# Altium PCB LTM8051.PcbDoc
Units mm, origin at the board's own origin, x right, y up, seen from the top; angles counter-clockwise.
Board outline 50 x 50 mm, 2 copper layers (L1, L6), stack 0.142 mm thick; 19 components, 8 nets, 121 pads, 59 vias.
Unrouted connection lines stored in the file: 98.
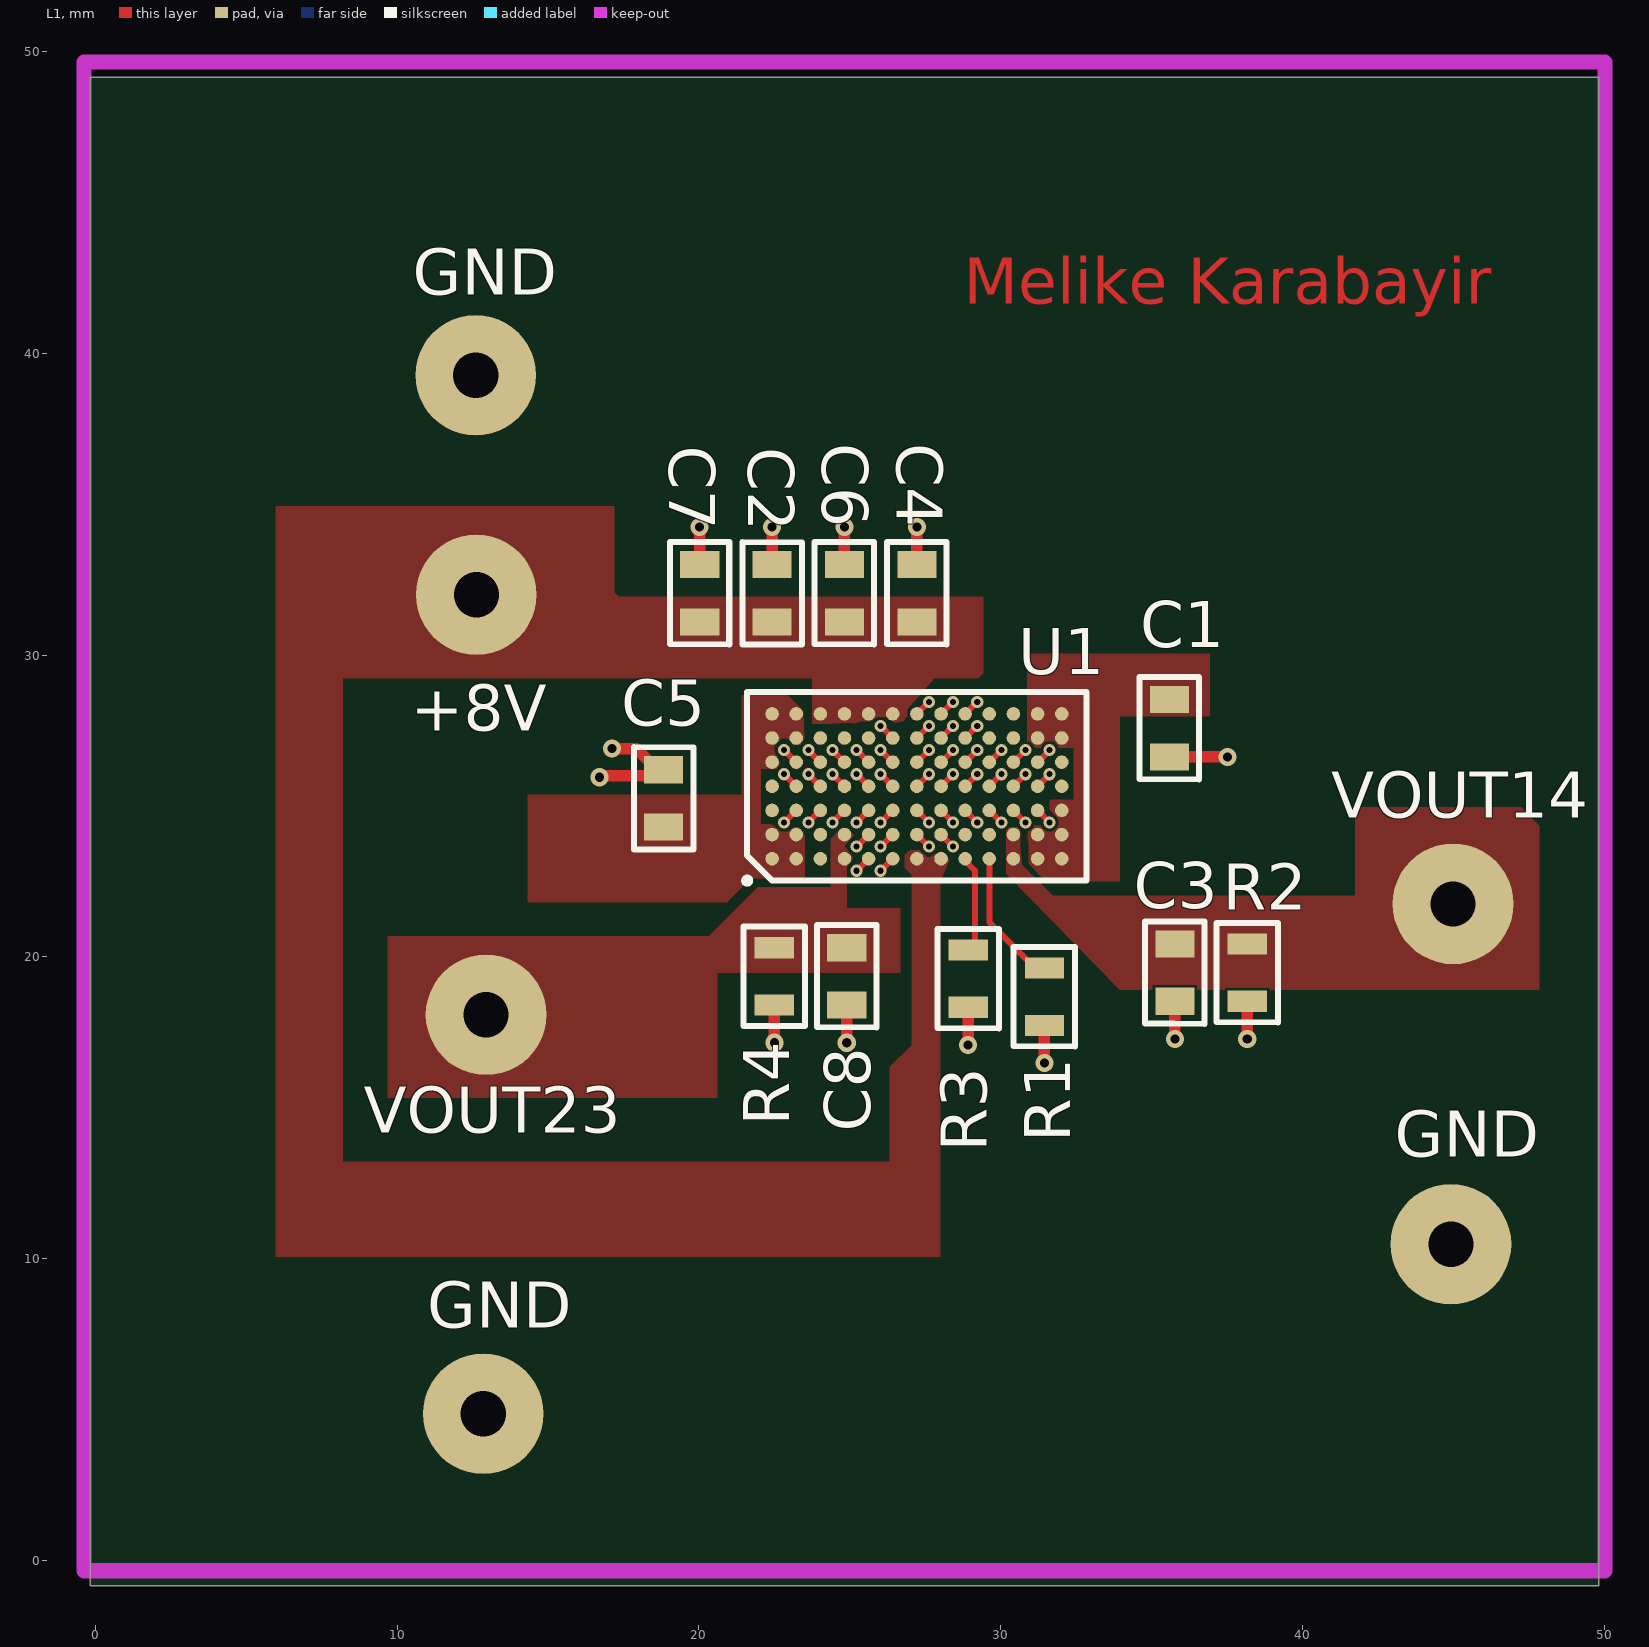
[diagram p0: L1 view]
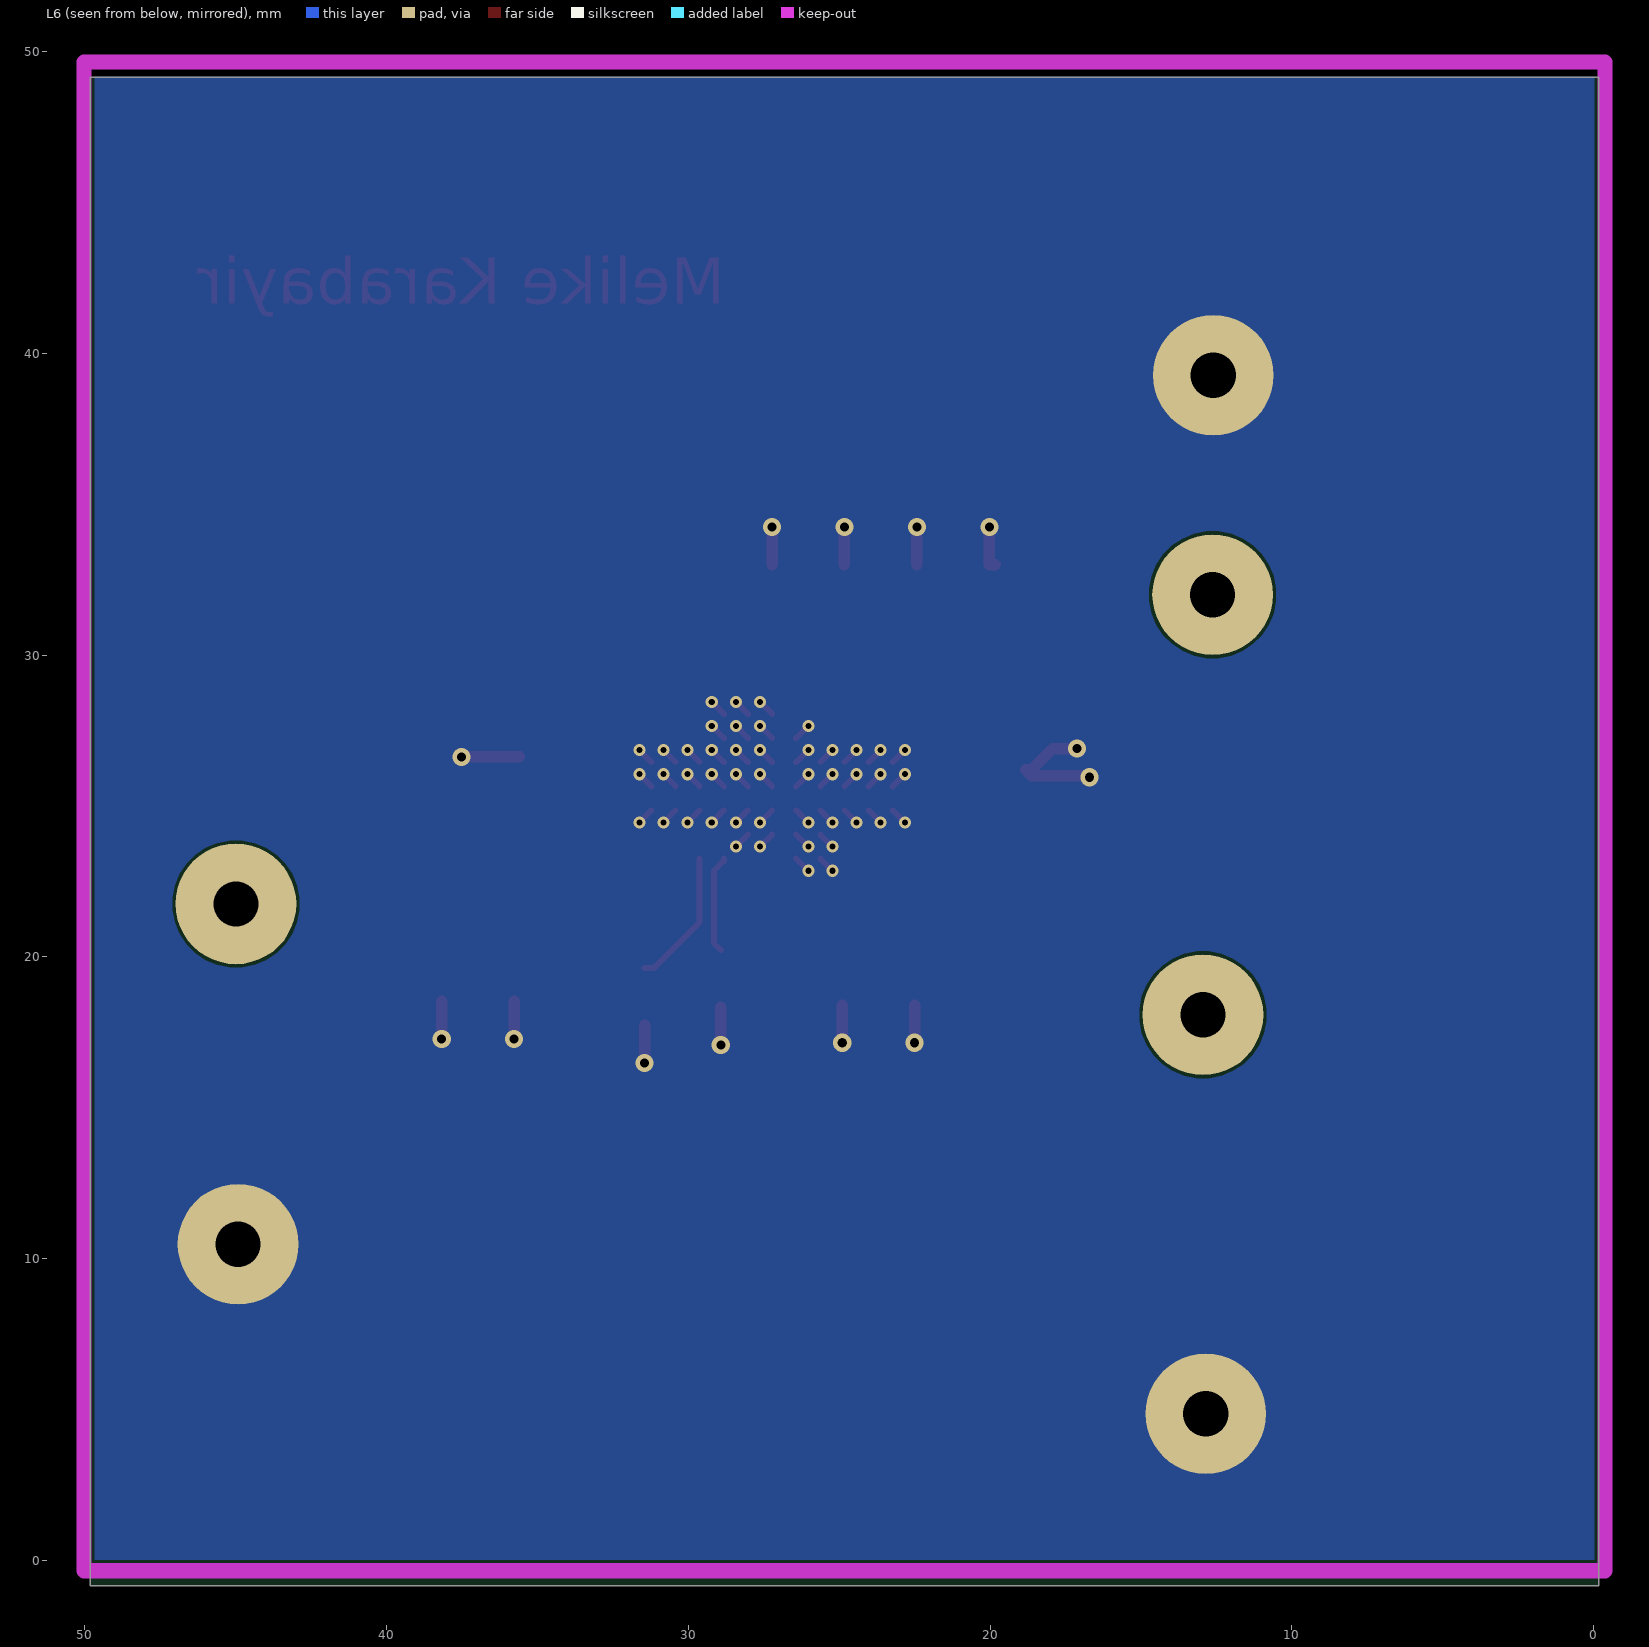
[diagram p1: L6 view, seen from below]

## Layer stack, top to bottom
Top Solder: solder mask 0.0102, Solder Resist, Dk 3.5
L1: signal copper 0.0356
Dielectric 2: prepreg 0.0711, PP-006, Dk 4.1
L6: signal copper 0.0356
Bottom Solder: solder mask 0.0102, Solder Resist, Dk 3.5

## Board outline
-0.175,-0.85 49.825,-0.85 49.825,49.15 -0.175,49.15

## Design rules (kind name [scope] priority, off if disabled: settings)
Clearance [All] p1: gap=0.1 ignorepadtopadclearanceinfootprint=FALSE
ComponentClearance [All] p1: gap=0.099 collisioncheckmode=3 verticalgap=0.099 showdistances=FALSE
MinimumSolderMaskSliver [All] p1: minsoldermaskwidth=0.1
NetAntennae [All] p1: netantennaetolerance=3
PlaneConnect [All] p1: planeconnectstyle=Relief reliefexpansion=0.508 reliefentries=4 reliefconductorwidth=0.254 reliefairgap=0.1
PolygonConnect [All] p1: connectstyle=Direct reliefconductorwidth=0.254 reliefentries=4 polygonreliefangle="90 Angle" airgapwidth=0.254
RoutingVias [All] p1: holewidth=0.3 width=0.6 viastyle="Through Hole" minholewidth=0.3 minwidth=0.6 maxholewidth=0.3 maxwidth=0.6
SilkToSilkClearance [All] p1: silktosilkclearance=0.1
SilkToSolderMaskClearance [IsPad] p1: minsilkscreentomaskgap=0.1 clearancetoexposedcopper=TRUE
SolderMaskExpansion [All] p1: expansion=0.102 istentingtop=FALSE
Width [All] p1: maxlimit=10 minlimit=0.2 preferedwidth=0.2
24 further rules are at their usual default settings.

## Components (designator, comment, footprint, x,y, rotation, side; value= is the part's Value field where it differs from the comment)
+8V "4MMx1.5MM" PAD_WITH_HOLE_4MMx1MM5 12.655,32 r0 top (schematic designator J1)
C1 "100uF" C0805 35.6,27.575 r90 top
C2 "1uF" C0805 22.425,32.05 r270 top
C3 "100uF" C0805 35.775,19.475 r90 top
C4 "1uF" C0805 27.225,32.05 r90 top
C5 "100uF" C0805 18.825,25.25 r270 top
C6 "1uF" C0805 24.825,32.05 r90 top
C7 "1uF" C0805 20.025,32.05 r90 top
C8 "100uF" C0805 24.9,19.35 r90 top
GND "4MMx1.5MM" PAD_WITH_HOLE_4MMx1MM5 12.88,4.85 r0 top (schematic designator J6)
GND "4MMx1.5MM" PAD_WITH_HOLE_4MMx1MM5 44.955,10.475 r0 top (schematic designator J4)
GND "4MMx1.5MM" PAD_WITH_HOLE_4MMx1MM5 12.63,39.275 r0 top (schematic designator J2)
R1 "23.2K" R0805 31.45,18.675 r90 top value=23.2kR
R2 "100k" R0805 38.175,19.475 r90 top
R3 "24.9K" R0805 28.925,19.275 r90 top value=24.9kR
R4 "39.2K" R0805 22.5,19.35 r90 top
U1 "LTM8051" BGA91C80P7X13_625X1125X241 27.225,25.65 r90 top
VOUT14 "4MMx1.5MM" PAD_WITH_HOLE_4MMx1MM5 45.025,21.75 r0 top (schematic designator J3)
VOUT23 "4MMx1.5MM" PAD_WITH_HOLE_4MMx1MM5 12.975,18.075 r0 top (schematic designator J5)

## Footprints (in the part's own frame and the unit in brackets; to place one, negate y for a bottom-side part, rotate by r counter-clockwise, add the part's x,y. Pads: shape width x height; smd on the part's side, far side on the other; paste and mask are expansions set on the pad)
BGA91C80P7X13_625X1125X241 [mm]
  round 0.45 smd: A1(-2.4,4.8) A2(-1.6,4.8) A3(-0.8,4.8) A4(0,4.8) A5(0.8,4.8) A6(1.6,4.8) A7(2.4,4.8) B1(-2.4,4) B2(-1.6,4) B3(-0.8,4) B4(0,4) B5(0.8,4) B6(1.6,4) B7(2.4,4) C1(-2.4,3.2) C2(-1.6,3.2) C3(-0.8,3.2) C4(0,3.2) C5(0.8,3.2) C6(1.6,3.2) C7(2.4,3.2) D1(-2.4,2.4) D2(-1.6,2.4) D3(-0.8,2.4) D4(0,2.4) D5(0.8,2.4) D6(1.6,2.4) D7(2.4,2.4) E1(-2.4,1.6) E2(-1.6,1.6) E3(-0.8,1.6) E4(0,1.6) E5(0.8,1.6) E6(1.6,1.6) E7(2.4,1.6) F1(-2.4,0.8) F2(-1.6,0.8) F3(-0.8,0.8) F4(0,0.8) F5(0.8,0.8) F6(1.6,0.8) F7(2.4,0.8) G1(-2.4,0) G2(-1.6,0) G3(-0.8,0) G4(0,0) G5(0.8,0) G6(1.6,0) G7(2.4,0) H1(-2.4,-0.8) H2(-1.6,-0.8) H3(-0.8,-0.8) H4(0,-0.8) H5(0.8,-0.8) H6(1.6,-0.8) H7(2.4,-0.8) J1(-2.4,-1.6) J2(-1.6,-1.6) J3(-0.8,-1.6) J4(0,-1.6) J5(0.8,-1.6) J6(1.6,-1.6) J7(2.4,-1.6) K1(-2.4,-2.4) K2(-1.6,-2.4) K3(-0.8,-2.4) K4(0,-2.4) K5(0.8,-2.4) K6(1.6,-2.4) K7(2.4,-2.4) L1(-2.4,-3.2) L2(-1.6,-3.2) L3(-0.8,-3.2) L4(0,-3.2) L5(0.8,-3.2) L6(1.6,-3.2) L7(2.4,-3.2) M1(-2.4,-4) M2(-1.6,-4) M3(-0.8,-4) M4(0,-4) M5(0.8,-4) M6(1.6,-4) M7(2.4,-4) N1(-2.4,-4.8) N2(-1.6,-4.8) N3(-0.8,-4.8) N4(0,-4.8) N5(0.8,-4.8) N6(1.6,-4.8) N7(2.4,-4.8)
  silkscreen extent -3.22,-5.63 3.13,5.72
C0805 [mm]
  rect 0.9x1.3 smd: 1(-0.95,0) 2(0.95,0)
  silkscreen extent -1.7,-0.98 1.7,0.99
PAD_WITH_HOLE_4MMx1MM5 [mm]
  round 4 hole 1.5: 1(-0.03,0)
R0805 [mm]
  rect 0.7x1.3 smd: 1(-0.95,0) 2(0.95,0)
  silkscreen extent -1.65,-1.02 1.65,1.02

## Part data
+8V GND GND GND VOUT14 VOUT23: library part PAD_WITH_HOLE_4MMx1MM5, "Pad with a hole 4mmx1.5mm"
C1 C3 C5 C8: library part CM21X5R107M06AT, "100UF 6.3V 20% 0805", Manufacturer="Kyocera AVX", Supplier Part Number=478-CM21X5R107M06ATCT-ND, Category=Uncategorized, Manufacturer Part Number=CM21X5R107M06AT, Pricing="1=1,2, 10=0,95, 50=0,8236, 100=0,7128, 500=0,53856, 1000=0,4752 (USD)", RoHS=No, Stock=7994, Supplier=Digi-Key
C2 C4 C6 C7: library part C2012X5R1H105M085AB, "Cap Ceramic 1uF 50V X5R 20% SMD 0805 85°C Punched Paper T/R", Case Code (Metric)=2012, Case Code (Imperial)=0805, Dielectric=X5R, Dielectric Material=Ceramic, Manufacturer=TDK, Max Operating Temperature=85°C, Min Operating Temperature=-55°C, Package Quantity=4000, Supplier Part Number=445-14402-1-ND, Tolerance=20%, Voltage Rating=50V, Case/Package=0805, Category="Ceramic Capacitors", ComponentLink1Description=https://datasheet.ciiva.com/14896/tdkmlcccaprange-14896957.pdf?src-supplier=Digi-Key, ComponentLink1URL=https://datasheet.ciiva.com/14896/tdkmlcccaprange-14896957.pdf?src-supplier=Digi-Key, ComponentLink2Description=https://datasheet.ciiva.com/14896/tdkmlcccaprange-14896958.pdf?src-supplier=Digi-Key, ComponentLink2URL=https://datasheet.ciiva.com/14896/tdkmlcccaprange-14896958.pdf?src-supplier=Digi-Key, ComponentLink3Description=https://datasheet.ciiva.com/14896/tdkmlcccaprange-14896959.pdf?src-supplier=Digi-Key, ComponentLink3URL=https://datasheet.ciiva.com/14896/tdkmlcccaprange-14896959.pdf?src-supplier=Digi-Key, Height=0.85mm, Lead Free="Lead Free", Length=0.079inch, Manufacturer Part Number=C2012X5R1H105M085AB, Mounting Technology="Surface Mount", Packaging="Tape and Reel", Pricing="1=0,24, 10=0,164, 50=0,1094, 100=0,0931, 500=0,0657, 1000=0,05748 (USD)", RoHS=Yes, RoHS Compliant=Yes, Series=C, Stock=11936, Supplier=Digi-Key, Termination=SMD/SMT, Thickness=0.039inch, Voltage Rating (DC)=50V, Weight=0.000194oz, Width=0.049inch
R1: library part ERJ-6ENF2322V, "Res Thick Film 0805 23.2K Ohm 1% 1/8W", Case Code (Metric)=2012, Case Code (Imperial)=0805, Manufacturer=Panasonic, Max Operating Temperature=155°C, Max Power Dissipation=125mW, Min Operating Temperature=-55°C, Package Quantity=1, Resistance Tolerance=1%, Resistor Type="Thick Film", Supplier Part Number=667-ERJ-6ENF2322V, Temperature Coefficient=100ppm/°C, Voltage Rating=150V, Case/Package=0805, Category="Chip SMD Resistors", ComponentLink1Description=https://datasheet.ciiva.com/30086/aoa0000ce2-30086557.pdf?src-supplier=Onlinecomponents.com, ComponentLink1URL=https://datasheet.ciiva.com/30086/aoa0000ce2-30086557.pdf?src-supplier=Onlinecomponents.com, ComponentLink2Description=https://datasheet.ciiva.com/15829/aoa0000ce2-15829836.pdf?src-supplier=Onlinecomponents.com, ComponentLink2URL=https://datasheet.ciiva.com/15829/aoa0000ce2-15829836.pdf?src-supplier=Onlinecomponents.com, ComponentLink3Description=https://datasheet.ciiva.com/7870/aoa0000ce2-7870831.pdf?src-supplier=Element14, ComponentLink3URL=https://datasheet.ciiva.com/7870/aoa0000ce2-7870831.pdf?src-supplier=Element14, ComponentLink4Description=https://datasheet.ciiva.com/16770/70260748-16770232.pdf?src-supplier=Allied+Electronics, ComponentLink4URL=https://datasheet.ciiva.com/16770/70260748-16770232.pdf?src-supplier=Allied+Electronics, ComponentLink5Description=https://datasheet.ciiva.com/16766/70260748-16766008.pdf?src-supplier=Allied+Electronics, ComponentLink5URL=https://datasheet.ciiva.com/16766/70260748-16766008.pdf?src-supplier=Allied+Electronics, ComponentLink6Description=https://datasheet.ciiva.com/28548/1694929-28548334.pdf?src-supplier=Element14, ComponentLink6URL=https://datasheet.ciiva.com/28548/1694929-28548334.pdf?src-supplier=Element14, ComponentLink7Description=https://datasheet.ciiva.com/24026/aoa0000ce2-24026235.pdf?src-supplier=Mouser, ComponentLink7URL=https://datasheet.ciiva.com/24026/aoa0000ce2-24026235.pdf?src-supplier=Mouser, Contact Plating=Tin, Depth=1.25mm, Features="Automotive AEC-Q200", Height=0.6mm, Lead Free="Lead Free", Length=2mm, Manufacturer Part Number=ERJ-6ENF2322V, Mounting Technology="Surface Mount", Number of Terminations=2, Packaging="Tape and Reel", Power Rating=125mW, Pricing="1=0,1, 10=0,047, 50=0,047, 100=0,021, 1000=0,015, 10000=0,01 (USD)", Reach SVHC Compliant=Yes, RoHS=Yes, RoHS Compliant=Yes, Series=ERJ, Stock=39678, Supplier=Mouser, Technology="THICK FILM", Termination=SMD/SMT, Tolerance=1%, Voltage Rating (DC)=150V, Width=1.2mm
R2: library part ERA-6AEB104V, "Res Thin Film 0805 100K Ohm 0.1% 1/8W ±25ppm/°C Molded SMD SMD Punched Carrier T/R", Manufacturer=Panasonic, Supplier Part Number=P100KDACT-ND, Category="Chip SMD Resistors", ComponentLink1Description=https://datasheet.ciiva.com/11811/0900766b80beefcc-11811258.pdf?src-supplier=Rs, ComponentLink1URL=https://datasheet.ciiva.com/11811/0900766b80beefcc-11811258.pdf?src-supplier=Rs, ComponentLink2Description=https://datasheet.ciiva.com/26335/453651-da-01-en-widerstand-0805-era-26335725.pdf?src-supplier=Conrad, ComponentLink2URL=https://datasheet.ciiva.com/26335/453651-da-01-en-widerstand-0805-era-26335725.pdf?src-supplier=Conrad, ComponentLink3Description=https://datasheet.ciiva.com/22758/485442-22758153.pdf?src-supplier=Farnell, ComponentLink3URL=https://datasheet.ciiva.com/22758/485442-22758153.pdf?src-supplier=Farnell, ComponentLink4Description=https://datasheet.ciiva.com/22758/485442-22758155.pdf?src-supplier=Farnell, ComponentLink4URL=https://datasheet.ciiva.com/22758/485442-22758155.pdf?src-supplier=Farnell, ComponentLink5Description=https://datasheet.ciiva.com/43457/485442-43457791.pdf?src-supplier=Farnell, ComponentLink5URL=https://datasheet.ciiva.com/43457/485442-43457791.pdf?src-supplier=Farnell, ComponentLink6Description=https://datasheet.ciiva.com/16396/aoa0000ce26-16396829.pdf?src-supplier=Future+Electronics, ComponentLink6URL=https://datasheet.ciiva.com/16396/aoa0000ce26-16396829.pdf?src-supplier=Future+Electronics, ComponentLink7Description=https://datasheet.ciiva.com/9186/aoa0000ce26-9186703.pdf?src-supplier=Avnet, ComponentLink7URL=https://datasheet.ciiva.com/9186/aoa0000ce26-9186703.pdf?src-supplier=Avnet, ComponentLink8Description=https://datasheet.ciiva.com/46438/485442-46438215.pdf?src-supplier=Element14, ComponentLink8URL=https://datasheet.ciiva.com/46438/485442-46438215.pdf?src-supplier=Element14, ComponentLink9Description=https://datasheet.ciiva.com/46438/485442-46438216.pdf?src-supplier=Element14, ComponentLink9URL=https://datasheet.ciiva.com/46438/485442-46438216.pdf?src-supplier=Element14, ComponentLink10Description=https://datasheet.ciiva.com/46438/485442-46438217.pdf?src-supplier=Element14, ComponentLink10URL=https://datasheet.ciiva.com/46438/485442-46438217.pdf?src-supplier=Element14, ComponentLink11Description=https://datasheet.ciiva.com/16768/70068849-16768795.pdf?src-supplier=Allied+Electronics, ComponentLink11URL=https://datasheet.ciiva.com/16768/70068849-16768795.pdf?src-supplier=Allied+Electronics, ComponentLink12Description=https://datasheet.ciiva.com/16763/70068849-16763132.pdf?src-supplier=Allied+Electronics, ComponentLink12URL=https://datasheet.ciiva.com/16763/70068849-16763132.pdf?src-supplier=Allied+Electronics, ComponentLink13Description=https://datasheet.ciiva.com/48425/era-eng-tds-48425749.pdf?src-supplier=Distrelec, ComponentLink13URL=https://datasheet.ciiva.com/48425/era-eng-tds-48425749.pdf?src-supplier=Distrelec, ComponentLink14Description=https://datasheet.ciiva.com/48529/era-eng-tds-48529996.pdf?src-supplier=Distrelec, ComponentLink14URL=https://datasheet.ciiva.com/48529/era-eng-tds-48529996.pdf?src-supplier=Distrelec, Manufacturer Part Number=ERA-6AEB104V, Pricing="1=0,31, 10=0,264, 50=0,1394, 100=0,1034, 500=0,0625, 1000=0,04327 (USD)", RoHS=Yes, Stock=191439, Supplier=Digi-Key
R3: library part AC0805FR-0724K9L, "SMD Chip Resistor, 24.9 kOhm, ± 1%, 125 mW, 0805 [2012 Metric], Thick Film, General Purpose", Case Code (Metric)=2012, Case Code (Imperial)=0805, Manufacturer=Yageo, Max Operating Temperature=155°C, Max Power Dissipation=125mW, Min Operating Temperature=-55°C, Supplier Part Number=13-AC0805FR-0724K9LCT-ND, Temperature Coefficient=100ppm/°C, Tolerance=1%, Voltage Rating=150V, Case/Package=0805, Category="Chip SMD Resistors", ComponentLink1Description=http://www.mouser.com/ds/2/447/yageodocoutput-1111992.pdf?src-supplier=Mouser, ComponentLink1URL=http://www.mouser.com/ds/2/447/yageodocoutput-1111992.pdf?src-supplier=Mouser, ComponentLink2Description=http://www.yageo.com/NewPortal/yageodocoutput?fileName=/pdf/R-Chip/PYu-AC_51_RoHS_L_6.pdf&src-supplier=Digi-Key, ComponentLink2URL=http://www.yageo.com/NewPortal/yageodocoutput?fileName=/pdf/R-Chip/PYu-AC_51_RoHS_L_6.pdf&src-supplier=Digi-Key, Features="Moisture Resistant,Automotive AEC-Q200", Height=0.024inch, Length=0.079inch, Manufacturer Part Number=AC0805FR-0724K9L, Number of Terminations=2, Packaging="Tape and Reel", Power Rating=125mW, Pricing="1=0,1, 10=0,029, 50=0,0188, 100=0,0158, 500=0,01096, 1000=0,00948 (USD)", RoHS=Yes, RoHS Compliant=Yes, Series=AC, Stock=35788, Supplier=Digi-Key, Termination=SMD/SMT, Width=1.25mm
R4: library part ERJ-6ENF3922V, "Res Thick Film 0805 39.2K Ohm 1% 1/8W ±100ppm/°C Molded SMD Punched Carrier T/R", Manufacturer=Panasonic, Supplier Part Number=P39.2KCCT-ND, Category="Chip SMD Resistors", ComponentLink1Description=https://datasheet.ciiva.com/15159/getdatasheetpartid-29130-15159258.pdf?src-supplier=Verical, ComponentLink1URL=https://datasheet.ciiva.com/15159/getdatasheetpartid-29130-15159258.pdf?src-supplier=Verical, ComponentLink2Description=https://datasheet.ciiva.com/9189/aoa0000ce2-9189961.pdf?src-supplier=Avnet, ComponentLink2URL=https://datasheet.ciiva.com/9189/aoa0000ce2-9189961.pdf?src-supplier=Avnet, Manufacturer Part Number=ERJ-6ENF3922V, Pricing="1=0,1, 10=0,079, 50=0,0424, 100=0,0303, 500=0,01878, 1000=0,01333 (USD)", RoHS=Yes, Stock=54485, Supplier=Digi-Key
U1: library part LTM8051EY#PBF, "Switching Regulator, Current-mode, 2.5A, 3000kHz Switching Freq-Max, Hybrid, PBGA91", Manufacturer="Analog Devices", Supplier Part Number=505-LTM8051EY#PBF-ND, Category="Board Mount Modules", Manufacturer Part Number=LTM8051EY#PBF, Pricing="1=20,72, 10=19,111, 25=18,2516, 80=16,31913, 273=15,56762, 546=14,8161 (USD)", RoHS=No, Stock=1085, Supplier=Digi-Key

## Via types
v1: diameter 0.4, hole 0.2, L1 to L6, 46 vias
v2: diameter 0.6, hole 0.3, L1 to L6, 13 vias

## Nets (pads, with @x,y where several pads share a name; then routed paths per layer and width w, separated by ;. In a path a pad name is that pad's centre, name@x,y a point inside that pad or via, vN(x,y) a via of type N, cw(c..) or ccw(c..) an arc to the next point about the centre after c; other vN are vias at no path point)
+8V: +8V.1 C2.2 C4.1 C6.1 C7.1 U1.C7 U1.D7 U1.E7 U1.F7 U1.G1 U1.H1
GND: C1.1 C2.1 C3.1 C4.2 C5.1 C6.2 C7.2 C8.1 GND.1 R1.1 R2.1 R3.1 R4.1 U1.B3 U1.B4 U1.B5 U1.C3 U1.C4 U1.C5 U1.D3 U1.D4 U1.D5 U1.E1 U1.E2 U1.E3 U1.E4 U1.E5 U1.F1 U1.F2 U1.F3 U1.F4 U1.F5 U1.F6 U1.G2 U1.G3 U1.G4 U1.G5 U1.G6 U1.G7 U1.H2 U1.H3 U1.H4 U1.H5 U1.H6 U1.H7 U1.J3 U1.J4 U1.J5 U1.J6 U1.J7 U1.K3 U1.K4 U1.K5 U1.L3 U1.L4 U1.L5 U1.M3 U1.M4 U1.M5 | length 46
  L1 w0.2: v1(22.825,24.45) U1.B3 ; v1(22.825,26.05) U1.B4 ; v1(22.825,26.85) U1.B5 ; v1(23.625,24.45) U1.C3 ; v1(23.625,26.05) U1.C4 ; v1(24.425,24.45) U1.D3 ; v1(24.425,26.05) U1.D4 ; v1(25.225,22.85) U1.E1 ; v1(25.225,23.65) U1.E2 ; v1(25.225,24.45) U1.E3 ; v1(25.225,26.05) U1.E4 ; v1(25.225,26.85) U1.E5 ; v1(26.025,22.85) U1.F1 ; v1(26.025,23.65) U1.F2 ; v1(26.025,24.45) U1.F3 ; v1(26.025,26.05) U1.F4 ; v1(26.025,26.85) U1.F5 ; v1(26.025,27.65) U1.F6 ; U1.G2 v1(27.625,23.65) ; U1.G3 v1(27.625,24.45) ; U1.G4 v1(27.625,26.05) ; U1.G5 v1(27.625,26.85) ; U1.G6 v1(27.625,27.65) ; U1.G7 v1(27.625,28.45) ; U1.H2 v1(28.425,23.65) ; U1.H3 v1(28.425,24.45) ; U1.H4 v1(28.425,26.05) ; U1.H5 v1(28.425,26.85) ; U1.H6 v1(28.425,27.65) ; U1.H7 v1(28.425,28.45) ; U1.J3 v1(29.225,24.45) ; U1.J4 v1(29.225,26.05) ; U1.J5 v1(29.225,26.85) ; U1.J6 v1(29.225,27.65) ; U1.J7 v1(29.225,28.45) ; U1.K3 v1(30.025,24.45) ; U1.K4 v1(30.025,26.05) ; U1.K5 v1(30.025,26.85) ; U1.L3 v1(30.825,24.45) ; U1.L4 v1(30.825,26.05) ; U1.L5 v1(30.825,26.85) ; U1.M3 v1(31.625,24.45) ; U1.M4 v1(31.625,26.05) ; U1.M5 v1(31.625,26.85) ; v1(23.625,26.85) U1.C5 v1(23.625,26.85) ; v1(24.425,26.85) U1.D5 v1(24.425,26.85)
  L1 w0.381: v2(16.7,25.95) 16.742,25.992 18.617,25.992 18.725,26.1 C5.1 18.625,26.2 17.925,26.9 v2(17.125,26.9) ; C7.2@19.825,33 C7.2 v2(20.025,34.25) ; C2.1 v2(22.425,34.25) ; v2(22.5,17.15) R4.1 ; C6.2 v2(24.825,34.25) ; v2(24.9,17.15) C8.1 ; C4.2 v2(27.225,34.25) ; v2(28.925,17.075) R3.1 ; v2(31.45,16.475) R1.1 ; C1.1 v2(37.525,26.625) ; v2(35.775,17.275) C3.1 ; v2(38.175,17.275) R2.1
NetC1_2: C1.2 U1.M1 U1.M2 U1.M6 U1.M7 U1.N1 U1.N2 U1.N3 U1.N6 U1.N7
NetC5_2: C5.2 U1.A1 U1.A2 U1.A5 U1.A6 U1.A7 U1.B1 U1.B2 U1.B6 U1.B7
NetR1_2: R1.2 U1.K1 | length 4.6
  L1 w0.2: U1.K1 29.625,21.15 31.15,19.625 R1.2
NetR3_2: R3.2 U1.J1 | length 3.3
  L1 w0.2: U1.J1 28.825,23.182 29.15,22.857 29.15,20.45 R3.2
VOUT14: C3.2 R2.2 U1.L1 U1.L2 VOUT14.1
VOUT23: C8.2 R4.2 U1.D1 U1.D2 VOUT23.1
pads on no net: U1.A3 U1.A4 U1.C1 U1.C2 U1.C6 U1.D6 U1.E6 U1.J2 U1.K2 U1.K6 U1.K7 U1.L6 U1.L7 U1.N4 U1.N5

## Polygon pours and split planes (outlines as drawn)
+8V on L1 "8V" (solid, pour order 22): 10.6,29.225 10.6,34.85 10.405,34.925 5.975,34.925 5.975,10.05 28,10.05 28,18.325 28,21.775 28,22.525 28.3,23.175 28.15,23.425 27.925,23.472 27.65,23.3 27.575,23.3 27.325,23.525 27,23.525 26.825,23.375 26.825,22.95 27.05,22.725 27.05,17.075 26.325,16.35 26.325,13.2 8.2,13.2 8.2,34.125 8.2,29.225
VOUT23 on L1 "VOUT23" (solid, pour order 12): 9.687,15.325 20.325,15.325 20.6,15.325 20.6,19.475 26.675,19.475 26.7,19.5 26.675,19.475 26.675,21.575 26.7,21.6 26.6,21.6 24.9,21.6 24.9,22.25 24.9,22.972 25.115,23.287 24.875,23.6 24.81,23.685 25.152,24.027 24.81,24.37 24.375,23.915 24.375,22.3 21.95,22.3 20.325,20.675 9.687,20.675
VOUT14 on L1 "VOUT14" (solid, pour order 14): 47.25,24.95 47.85,24.35 47.85,18.9 33.95,18.9 30.184,22.75 30.184,24.3 30.65,24.3 30.65,23.65 30.7,23.05 30.887,22.862 31.725,22.025 34.95,22.025 35.225,22.025 41.75,22.025 41.75,24.95
+8V on L1 "8V" (solid, pour order 11): 9.325,34.925 17.2,34.925 17.2,32.075 17.35,31.925 29.425,31.925 29.425,29.4 29.257,29.232 27.8,29.232 26.898,28.206 26.898,28.027 26.898,27.948 26.825,27.8 26.757,27.807 26.507,27.762 26.35,27.85 26.175,27.948 26.075,27.948 25.948,27.948 25.756,27.854 25.659,27.807 25.425,27.8 25.275,27.775 25.15,27.725 24.975,27.75 24.4,27.725 23.75,27.725 23.75,29.225 9.325,29.225
NetC1_2 on L1 "NETC1_2" (solid, pour order 8): 30.875,28.325 30.875,27.125 31.075,26.925 31.075,26.9 31.3,26.9 31.575,27.15 31.7,27.15 31.925,26.925 32.425,26.925 32.425,25.2 31.625,25.2 31.625,25.125 31.625,24.875 31.9,24.575 31.925,24.425 31.9,24.35 31.725,24.175 31.5,24.175 31.325,24.35 31.05,24.35 30.925,24.225 30.9,23.975 30.925,23.7 30.925,23.35 30.925,23.075 31.5,22.5 33.95,22.5 33.95,27.975 36.925,27.975 36.925,30.037 30.875,30.037
NetC5_2 on L1 "NETC5_2" (solid, pour order 5): 22.05,26.225 22.075,26.225 22.56,26.225 22.662,26.371 22.662,26.5 22.5,26.8 22.5,27 22.737,27.237 22.937,27.237 23.017,27.158 23.122,27.024 23.366,27.024 23.488,27.208 23.45,28.15 22.938,28.662 21.425,28.663 21.425,25.35 21.45,25.325 21.45,24.975 21.887,24.975 22.05,24.812
NetC5_2 on L1 "NETC5_2" (solid, pour order 3): 22.05,24.4 22.225,24.4 22.4,24.4 22.737,24.15 22.925,24.15 23.169,24.306 23.308,24.292 23.45,24.15 23.5,23.975 23.5,22.6 23.117,22.6 21.725,22.6 20.925,21.8 14.375,21.8 14.325,21.85 14.325,25.375 22.05,25.375
GND on L6 "GND" (solid, remove dead copper, pour order 10): -0.125,49.175 50.1,49.175 49.925,49 49.925,-0.4 -0.5,-0.4 -0.6,-0.5

## Keep-outs
Keep-Out Layer:
  lines w0.5: -0.375,48.85 -0.375,49.65 1.225,49.65 50.025,49.65 50.025,-0.35 -0.375,-0.35 -0.375,49.25

## Other copper
L1:
  text "Melike Karabayir" at 28.775,41.65 h1.52